# EAGLE board microSRCPShieldV2 (EAGLE 6.5.0)
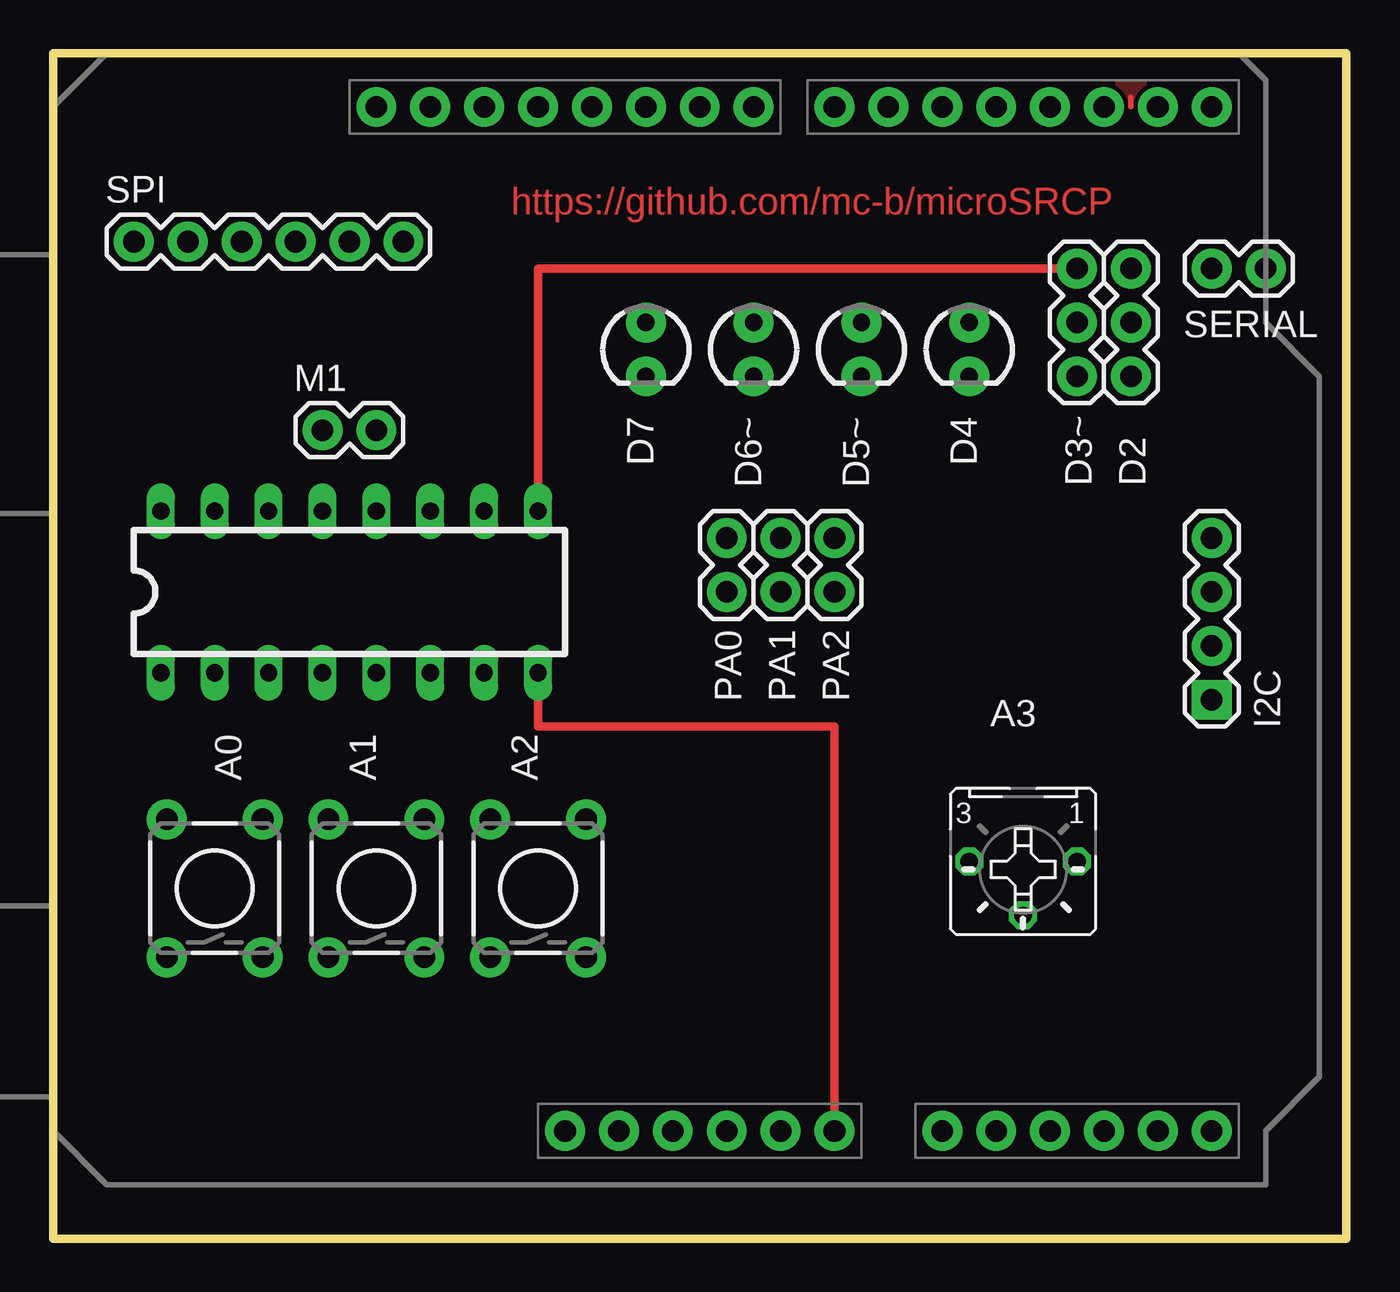
[diagram p0: board, top side]
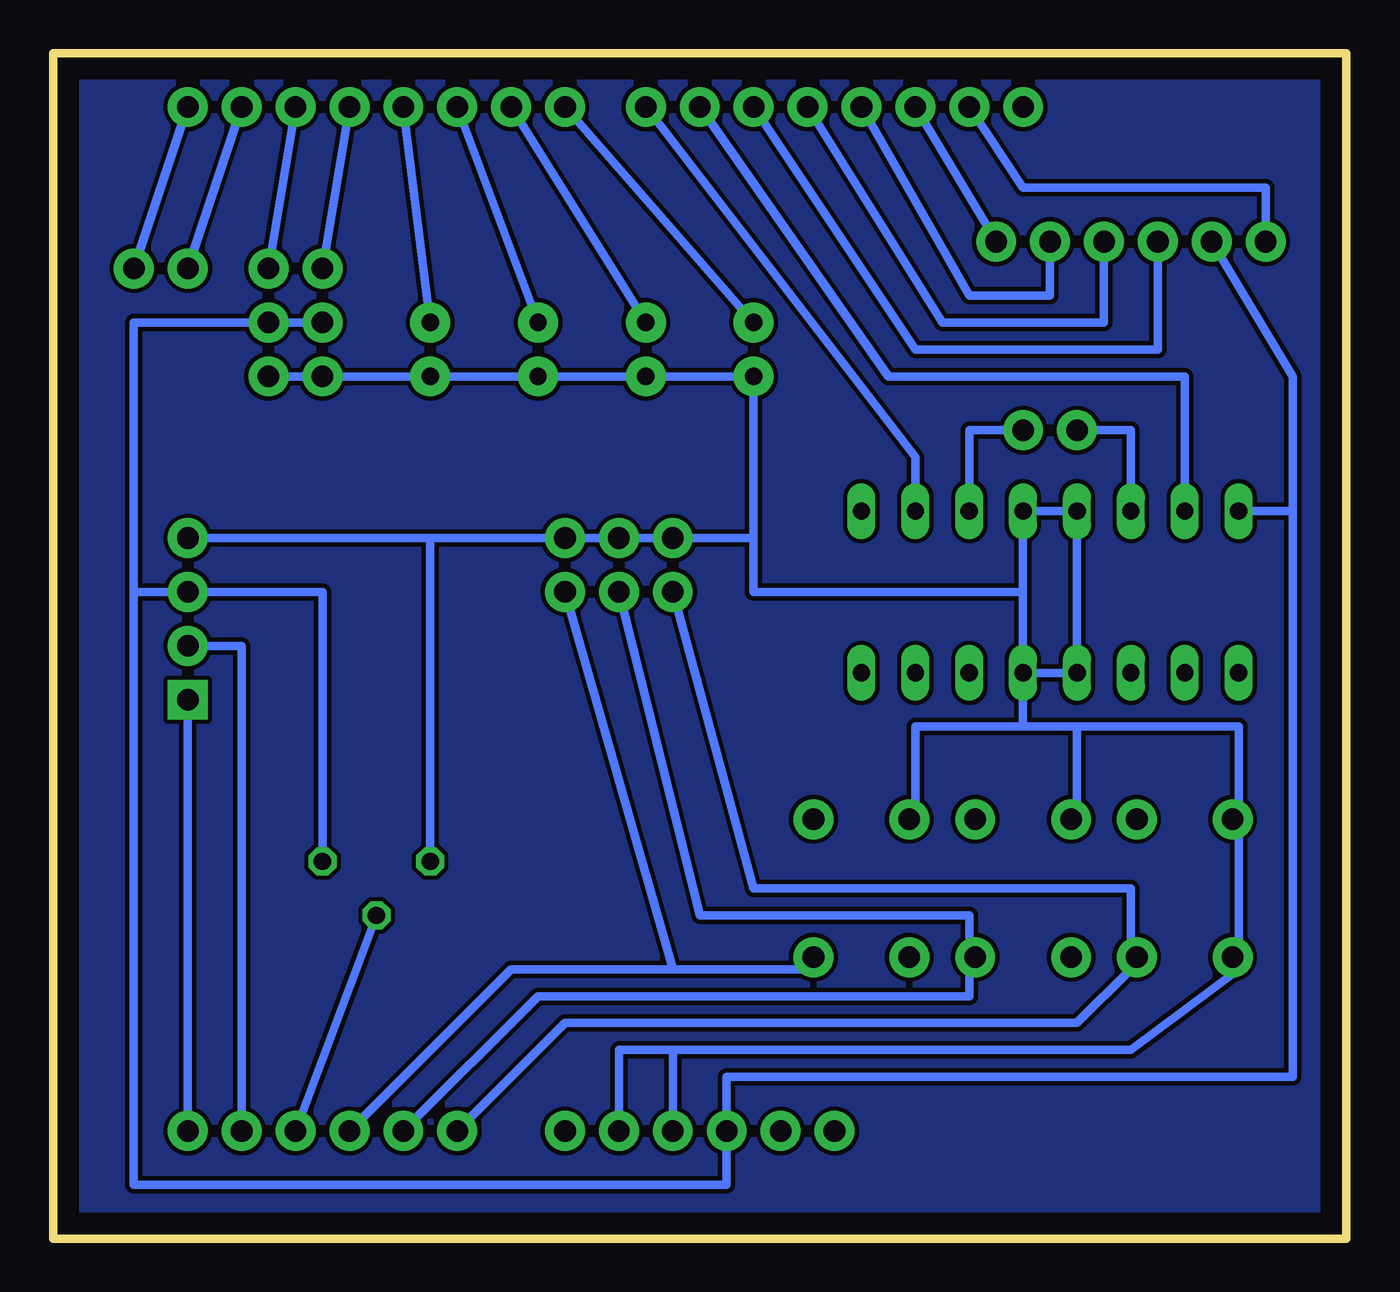
[diagram p1: board, bottom side, seen from below]

Size 60.96 x 55.88 mm. Coordinates in mm from the lower left corner, seen from the top.
Outline: 0,0 60.96,0 60.96,55.88 0,55.88 0,0
Copper layers (1*16): Top 0.035mm / dielectric 1.5mm / Bottom 0.035mm
Design rules "default": minimum track width 10mil, minimum drill 24mil, track to track 8mil, track to pad 8mil, pad to pad 8mil, via to via 8mil, smd to smd 8mil, copper to edge 40mil, drill to drill 8mil, minimum pad ring 10mil, minimum via ring 8mil, stop-mask expansion 4mil, vias tented up to drill 0mil, thermal gap 10mil

## Footprints (pad centres in the part's own frame; a part is rotated, then mirrored left to right if it is on the bottom)
DIL16 = drill 0.813 long: 1 -8.89,-3.81; 2 -6.35,-3.81; 3 -3.81,-3.81; 4 -1.27,-3.81; 5 1.27,-3.81; 6 3.81,-3.81; 7 6.35,-3.81; 8 8.89,-3.81; 9 8.89,3.81; 10 6.35,3.81; 11 3.81,3.81; 12 1.27,3.81; 13 -1.27,3.81; 14 -3.81,3.81; 15 -6.35,3.81; 16 -8.89,3.81
DUEMILANOVE_SHIELD_NOHOLES_NOLABELS = drill 1.016 pad 1.88: 3.3V 50.8,26.67; 5V 50.8,29.21; A0 50.8,41.91; A1 50.8,44.45; A2 50.8,46.99; A3 50.8,49.53; A4 50.8,52.07; A5 50.8,54.61; AREF 2.54,15.24; D2 2.54,49.53; D3 2.54,46.99; D4 2.54,44.45; D5 2.54,41.91; D6 2.54,39.37; D7 2.54,36.83; D8 2.54,33.02; D9 2.54,30.48; D10 2.54,27.94; D11 2.54,25.4; D12 2.54,22.86; D13 2.54,20.32; GND@0 50.8,31.75; GND@1 50.8,34.29; GND@2 2.54,17.78; RES 50.8,24.13; RX 2.54,54.61; TX 2.54,52.07; VIN 50.8,36.83
TACTILE-PTH = drill 1.016 pad 1.88: 1 -3.251,2.261; 2 3.251,2.261; 3 -3.251,-2.261; 4 3.251,-2.261
B25P = drill 0.813 octagon: A -2.54,0; E 2.54,0; S 0,2.54
1X03 = drill 1.016 pad 1.88: 1 0,0; 2 2.54,0; 3 5.08,0
LED3MM = drill 0.813 pad 1.88: A -1.27,0; K 1.27,0
1X04 = drill 1.016 pad 1.88 square: 1 0,0 | drill 1.016 pad 1.88: 2 2.54,0; 3 5.08,0; 4 7.62,0
1X02 = drill 1.016 pad 1.88: 1 0,0; 2 2.54,0
1X06 = drill 1.016 pad 1.88: 1 0,0; 2 2.54,0; 3 5.08,0; 4 7.62,0; 5 10.16,0; 6 12.7,0

## Placement (x,y rotation side)
1  L293D  [DIL16]  13.97,30.48 0 top
90  [DUEMILANOVE_SHIELD_NOHOLES_NOLABELS]  0,55.88 270 top
A0  [TACTILE-PTH]  7.62,16.51 90 top
A1  [TACTILE-PTH]  15.24,16.51 90 top
A2  [TACTILE-PTH]  22.86,16.51 90 top
A3  [B25P]  45.72,17.78 180 top
D2  [1X03]  50.8,40.64 90 top
D3~  [1X03]  48.26,40.64 90 top
D4  [LED3MM]  43.18,41.91 270 top
D5~  [LED3MM]  38.1,41.91 270 top
D6~  [LED3MM]  33.02,41.91 270 top
D7  [LED3MM]  27.94,41.91 270 top
I2C  [1X04]  54.61,25.4 90 top
M1  [1X02]  12.7,38.1 0 top
PA0  [1X02]  31.75,30.48 90 top
PA1  [1X02]  34.29,30.48 90 top
PA2  [1X02]  36.83,30.48 90 top
SERIAL  [1X02]  54.61,45.72 0 top
SPI  [1X06]  3.81,46.99 0 top

## Library data of the parts
1 = SparkFun-AnalogIC
90 SPI = SparkFun-Boards
A0 A1 A2 D2 D3~ = SparkFun-Electromechanical
A3 = pot
D4 D5~ D6~ D7 = SparkFun-LED
I2C = SparkFun-Connectors
M1 PA0 PA1 PA2 SERIAL = SparkFun-Capacitors

## Nets
5V: 1.16 90.5V A3.A D2.2 D3~.2 I2C.3 SPI.2
GND: 1.4 1.5 1.12 1.13 90.GND@0 90.GND@1 A3.E D2.1 D3~.1 D4.K D5~.K D6~.K D7.K I2C.4 PA0.2 PA1.2 PA2.2
GND2: 90.GND@2 SPI.1
S$1: 90.D10 SPI.3
S$2: 90.A5 I2C.1
S$3: 1.15 90.D9
S$4: 90.D13 SPI.6
S$5: 90.D7 D7.A
S$6: 90.D6 D6~.A
S$7: 90.D5 D5~.A
S$8: 90.D4 D4.A
S$9: 1.9 90.D3 D3~.3
S$10: 90.D2 D2.3
S$11: 90.D12 SPI.5
S$12: 90.TX SERIAL.1
S$13: 90.RX SERIAL.2
S$14: 90.D11 SPI.4
S$16: 90.A4 I2C.2
S$17: 90.A0 PA0.1
S$18: 90.A1
S$19: 90.A2 PA2.1
S$20: PA1.1
S$21: 90.A3 A3.S
S$22: 1.11 M1.2
S$24: 1.14 M1.1
S$25: 1.10 90.D8
VIN: 1.8 90.VIN

## Tracks (layer width: path | path; a pad name or v marks a point on that pad's centre or on a via)
5V
  Bottom 0.406: A3.A 48.26,30.48 I2C.3 57.15,30.48 | D3~.2 D2.2 57.15,43.18 57.15,30.48 | 57.15,30.48 57.15,2.54 29.21,2.54 90.5V 29.21,7.62 2.54,7.62 2.54,34.29 | 2.54,34.29 2.54,40.64 SPI.2 | 1.16 2.54,34.29
GND
  Bottom 0.406: 1.5 1.4 1.13 1.12 15.24,30.48 | 90.GND@0 31.75,8.89 | 31.75,8.89 10.16,8.89 5.08,12.7 5.08,24.13 12.7,24.13 | 12.7,20.32 12.7,24.13 | 12.7,24.13 15.24,24.13 | 15.24,24.13 20.32,24.13 20.32,20.32 | 1.5 15.24,24.13 | 1.5 15.24,30.48 | 15.24,30.48 27.94,30.48 27.94,33.02 | D2.1 D3~.1 D4.K D5~.K D6~.K D7.K 27.94,33.02 | 31.75,8.89 34.29,8.89 90.GND@1 | I2C.4 43.18,33.02 | 43.18,33.02 PA2.2 PA1.2 PA0.2 27.94,33.02 | 43.18,33.02 A3.E
GND2
  Bottom 0.406: 90.GND@2 15.24,49.53 3.81,49.53 SPI.1
S$1
  Bottom 0.406: 90.D10 20.32,41.91 8.89,41.91 SPI.3
S$2
  Bottom 0.406: 90.A5 I2C.1
S$3
  Bottom 0.406: 90.D9 21.59,40.64 7.62,40.64 1.15
S$4
  Bottom 0.406: 90.D13 SPI.6
S$5
  Bottom 0.406: 90.D7 D7.A
S$6
  Bottom 0.406: 90.D6 D6~.A
S$7
  Bottom 0.406: 90.D5 D5~.A
S$8
  Bottom 0.406: 90.D4 D4.A
S$9
  Top 0.406: D3~.3 22.86,45.72 1.9
  Bottom 0.406: 90.D3 D3~.3
S$10
  Bottom 0.406: 90.D2 D2.3
S$11
  Bottom 0.406: 90.D12 17.78,44.45 13.97,44.45 SPI.5
S$12
  Bottom 0.406: 90.TX SERIAL.1
S$13
  Bottom 0.406: 90.RX SERIAL.2
S$14
  Bottom 0.406: 90.D11 19.05,43.18 11.43,43.18 SPI.4
S$15
  pour Bottom: 0,55.88 0,0 60.96,0 60.96,55.88
S$16
  Bottom 0.406: 90.A4 52.07,27.94 I2C.2
S$17
  Bottom 0.406: 90.A0 36.83,10.16 12.7,10.16 10.16,12.7 10.16,16.51 27.94,16.51 PA0.1
S$18
  Bottom 0.406: 17.78,12.7 17.78,11.43 38.1,11.43 90.A1
S$19
  Bottom 0.406: 31.75,12.7 39.37,12.7 90.A2 | 25.4,12.7 31.75,12.7 | 31.75,12.7 PA2.1
S$20
  Bottom 0.406: 17.78,13.97 17.78,15.24 30.48,15.24 PA1.1
S$21
  Bottom 0.406: 90.A3 A3.S
S$22
  Bottom 0.406: 1.11 17.78,38.1 M1.2
S$23
  Top 0.254: 50.8,53.34 50.8,53.79
  pour Top: 0,55.88 0,0 60.96,0 60.96,55.88
S$24
  Bottom 0.406: M1.1 10.16,38.1 1.14
S$25
  Bottom 0.406: 90.D8 20.32,36.83 1.10
VIN
  Top 0.406: 90.VIN 36.83,24.13 22.86,24.13 1.8

## Text on the board
Top: https://github.com/mc-b/microSRCP